# Altium PCB PCB1.PcbDoc
Units mil, origin at the board's own origin, x right, y up, seen from the top; angles counter-clockwise.
Board outline 6000 x 4000 mil, 2 copper layers (Top Layer, Bottom Layer); 22 components, 8 nets, 76 pads, 0 vias.
Unrouted connection lines stored in the file: 30.
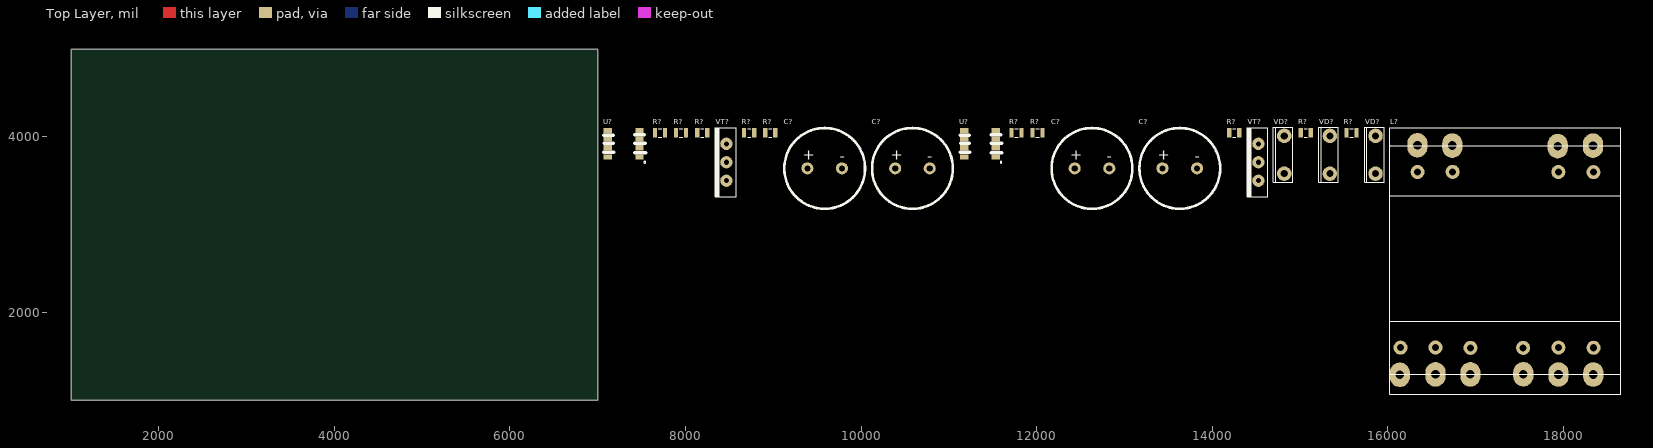
[diagram p0: Top Layer view]
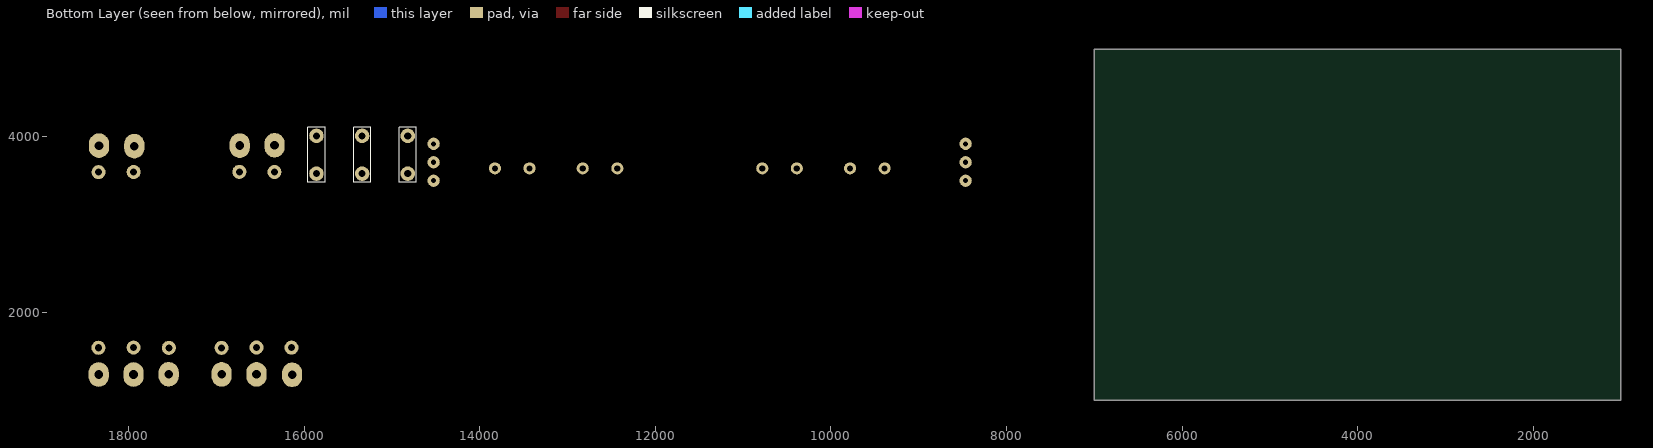
[diagram p1: Bottom Layer view, seen from below]

## Layer stack, top to bottom
Top Solder: solder mask 0.4, Solder Resist, Dk 3.5
Top Layer: signal copper 1.4
Dielectric 1: dielectric 12.6, FR-4, Dk 4.8
Bottom Layer: signal copper 1.4
Bottom Solder: solder mask 0.4, Solder Resist, Dk 3.5

## Board outline
1000,1000 7000,1000 7000,5000 1000,5000

## Design rules (kind name [scope] priority, off if disabled: settings)
Clearance [All] p1: gap=10 ignorepadtopadclearanceinfootprint=FALSE except(0: Arc-Hole Track-Hole SMDPad-Hole THPad-Hole Via-Hole Fill-Hole Poly-Hole Region-Hole Text-Hole)
PolygonConnect [All] p1: connectstyle=Relief reliefconductorwidth=10 reliefentries=4 polygonreliefangle="90 Angle" airgapwidth=10
RoomDefinition Sheet2 [InComponentClass('Sheet2')] p1: confinementstyle=ConfineIn formatcopy=TRUE lockcomponents=FALSE outline 7045,1060 18670,1060 18670,4220 7045,4220
RoutingVias [All] p1: holewidth=28 width=50 viastyle="Through Hole" minholewidth=28 minwidth=50 maxholewidth=28 maxwidth=50
SolderMaskExpansion [All] p1: expansion=4 istentingtop=FALSE
Width [All] p1: maxlimit=10 minlimit=10 preferedwidth=10
30 further rules are at their usual default settings.

## Classes and differential pairs
component class Sheet2: C? L? R? U? VD? VT?

## Components (designator, comment, footprint, x,y, rotation, side; value= is the part's Value field where it differs from the comment)
C? "CAP-POLAR" "CAP 100uF_500V 22x40mm" 10585,3640 r0 top
C? "CAP-POLAR" "CAP 100uF_500V 22x40mm" 13630,3640 r0 top
C? "CAP-POLAR" "CAP 100uF_500V 22x40mm" 12630,3640 r0 top
C? "CAP-POLAR" "CAP 100uF_500V 22x40mm" 9585,3640 r0 top
L? "750311457" Drossel 17280,2700 r0 top
R? "RES_1210" RES_SMD_1210_IPC_B 11770,4045 r0 top
R? "RES_1210" RES_SMD_1210_IPC_B 14250,4045 r0 top
R? "RES_1210" RES_SMD_1210_IPC_B 7950,4045 r0 top
R? "RES_1210" RES_SMD_1210_IPC_B 15065,4045 r0 top
R? "RES_1210" RES_SMD_1210_IPC_B 12010,4045 r0 top
R? "RES_1210" RES_SMD_1210_IPC_B 8965,4045 r0 top
R? "RES_1210" RES_SMD_1210_IPC_B 7710,4045 r0 top
R? "RES_1210" RES_SMD_1210_IPC_B 8725,4045 r0 top
R? "RES_1210" RES_SMD_1210_IPC_B 15585,4045 r0 top
R? "RES_1210" RES_SMD_1210_IPC_B 8190,4045 r0 top
U? "HCPL-3120" HCPL-3120 7295,3920 r0 top
U? "HCPL-3120" HCPL-3120 11355,3920 r0 top
VD? "MUR4060" TO-247-2 15340,3795 r90 top
VD? "MUR4060" TO-247-2 15860,3795 r90 top
VD? "MUR4060" TO-247-2 14820,3795 r90 top
VT? "IGBT 60N120T" TO-264-3 14500,3710 r90 top
VT? "IGBT 60N120T" TO-264-3 8440,3710 r90 top

## Footprints (in the part's own frame and the unit in brackets; to place one, negate y for a bottom-side part, rotate by r counter-clockwise, add the part's x,y. Pads: shape width x height; smd on the part's side, far side on the other; paste and mask are expansions set on the pad)
"CAP 100uF_500V 22x40mm" [mm]
  round 3.5 hole 1.8: 1(-5,0) 2(5,0)
  silkscreen extent -11.68,-11.68 11.68,11.68, body extent -11,-11 11.1,11.1, height 31.53
Drossel [mil]
  oval 230x280 hole 100: 1(-943,1204) 2(-546,1200) 3(655,1193) 4(1057,1199) 5(-1143,-1411) 6(-737,-1406) 7(664,-1408) 8(1061,-1408) 9(-340,-1406) 10(263,-1405)
  round 160 hole 80: 1(-941,899) 2(-541,901) 3(662,899) 4(1062,897) 5(-1136,-1102) 6(-737,-1100) 7(663,-1101) 8(1064,-1103) 9(-339,-1104) 10(262,-1104)
  silkscreen extent -1259,-1630 1376,1405, body extent -1251,-1399 1383,1203, height 2024
HCPL-3120 [mil]
  rect 94.49x60 smd mask+4: 1(180,-150) 2(180,-45) 3(180,55) 4(180,150) 5(-180,150) 6(-180,55) 7(-180,-45) 8(-180,-150)
  silkscreen extent -225,-220 250,105, body extent -191,-191 191,191, height 181
RES_SMD_1210_IPC_B [mil]
  rect 47.44x106.54 smd paste+0 mask+0: 1(-57.11,0) 2(57.11,0)
  silkscreen extent -19,-49 19,49, body extent -91,-63 91,63, height 10
TO-247-2 [mil]
  round 165.35 hole 80: 1(-215,0) 3(215,0)
  silkscreen extent -312,-98 312,125, body extent -311,-91 311,107, height 1472
TO-264-3 [mm]
  round 3.55 hole 1.45: 1(-5.334,-0.635) 2(0,-0.635) 3(5.334,-0.635)
  silkscreen extent -10.03,-3.43 10.03,2.54, body extent -10,-3.5 10,1.5, height 38.4

## Part data
L?: library part DROSEL, "Drosel", Manufacturer="Wuerth Elektronik", ComponentLink1Description="Manufacturer URL", ComponentLink1URL=http://www.we-online.com, ComponentLink2Description=Datasheet, ComponentLink2URL=http://katalog.we-online.de/pbs/datasheet/750311457.pdf, PackageReference=EP13, PartNumber=750311457, Ui=36V
VT? VT?: "IGBT 60N120T TO-264-3"

## Nets (pads, with @x,y where several pads share a name; then routed paths per layer and width w, separated by ;. In a path a pad name is that pad's centre, name@x,y a point inside that pad or via, vN(x,y) a via of type N, cw(c..) or ccw(c..) an arc to the next point about the centre after c; other vN are vias at no path point)
+18_1: U?.8@7115,3770
+18_2: U?.8@11175,3770
GND: C?.2@9781.85,3640 C?.2@10781.85,3640 R?.1@7892.89,4045 R?.1@8132.89,4045 U?.5@7115,4070 VD?.3@14820,4010 VT?.3@8465,3920
GND_II: L?.5 L?.6 L?.7 L?.8 U?.5@11175,4070 VD?.1@14820,3580 VT?.3@14525,3920
NetC?_1: C?.1@10388.15,3640 C?.2@13826.85,3640
NetL?_1: L?.1 L?.2 L?.3 L?.4 VD?.3@15340,4010 VD?.3@15860,4010 VT?.2@8465,3710
NetR?_1: R?.1@7652.89,4045 U?.6@7115,3975 U?.7@7115,3875
NetR?_2: R?.2@7767.11,4045 VT?.1@8465,3500
pads on no net: C?.1@9388.15,3640 C?.1@12433.15,3640 C?.1@13433.15,3640 C?.2@12826.85,3640 L?.9 L?.10 R?.1@8667.89,4045 R?.1@8907.89,4045 R?.1@11712.89,4045 R?.1@11952.89,4045 R?.1@14192.89,4045 R?.1@15007.89,4045 R?.1@15527.89,4045 R?.2@8007.11,4045 R?.2@8247.11,4045 R?.2@8782.11,4045 R?.2@9022.11,4045 R?.2@11827.11,4045 R?.2@12067.11,4045 R?.2@14307.11,4045 R?.2@15122.11,4045 R?.2@15642.11,4045 U?.1 U?.2 U?.3 U?.4 U?.6@11175,3975 U?.7@11175,3875 VD?.1@15340,3580 VD?.1@15860,3580 VT?.1@14525,3500 VT?.2@14525,3710

## Text inside footprints (layer, text, board x,y; h text height)
C?: Top Overlay "-" at 13800,3720.02 h120; Top Overlay "+" at 13380,3740.01 h120
C?: Top Overlay "-" at 12800,3720.02 h120; Top Overlay "+" at 12380,3740.01 h120
C?: Top Overlay "-" at 10755,3720.02 h120; Top Overlay "+" at 10335,3740.01 h120
C?: Top Overlay "-" at 9755,3720.02 h120; Top Overlay "+" at 9335,3740.01 h120